# EAGLE board ekomigacz_3R (EAGLE 9.3.2)
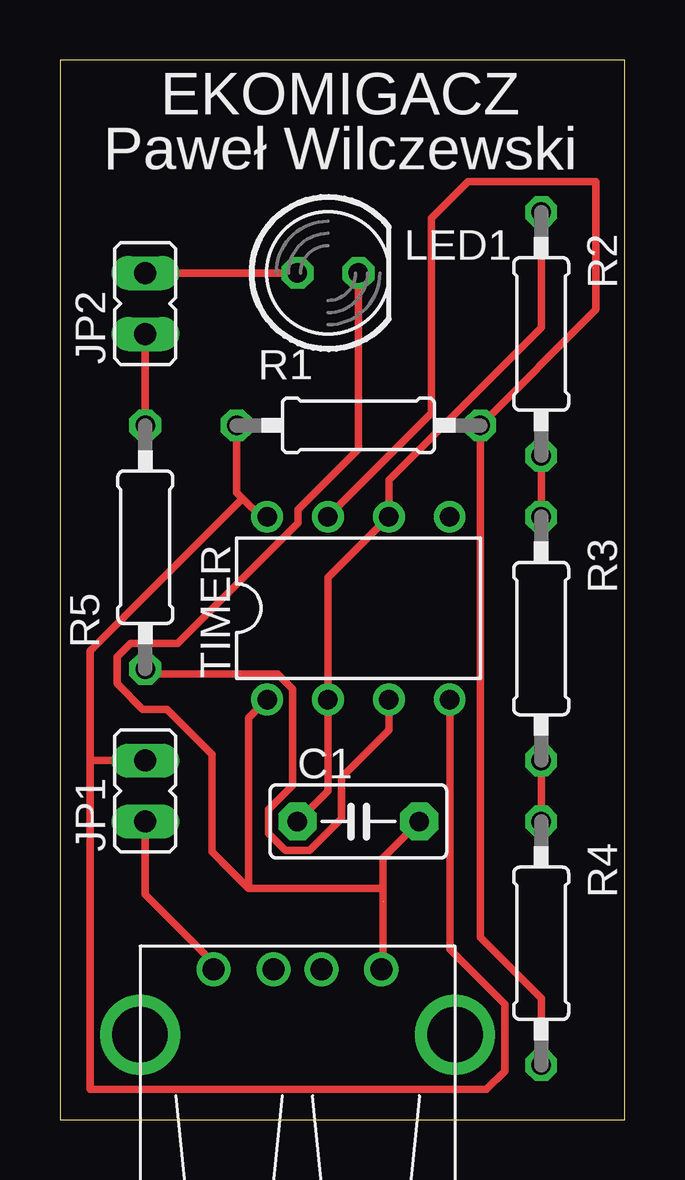
[diagram p0: board, top side]

Size 23.55 x 44.19 mm. Coordinates in mm from the lower left corner, seen from the top.
Outline: 0,0 23.55,0 23.55,44.19 0,44.19 0,0
Copper layers (1*16): Top 0.035mm / dielectric 1.5mm / Bottom 0.035mm
Design rules "default": minimum track width 6mil, minimum drill 0.35mm, track to track 6mil, track to pad 6mil, pad to pad 6mil, via to via 6mil, smd to smd 6mil, copper to edge 40mil, drill to drill 6mil, minimum pad ring 10mil, minimum via ring 8mil, stop-mask expansion 4mil, vias tented up to drill 0mil, thermal gap 10mil
Net classes: 0 default: width 0.305 mm, drill 0.508 mm, clearance 0.254 mm

## Footprints (pad centres in the part's own frame; a part is rotated, then mirrored left to right if it is on the bottom)
C5B3 = drill 0.813 pad 1.6 octagon: 1 -2.54,0; 2 2.54,0
JP1 = drill 0.914 long: 1 0,-1.27; 2 0,1.27
LED5MM = drill 0.813 octagon: A -1.27,0; K 1.27,0
0207/10 = drill 0.813 octagon: 1 -5.08,0; 2 5.08,0
DIL08 = drill 0.813 pad 1.27: 1 -3.81,-3.81; 2 -1.27,-3.81; 3 1.27,-3.81; 4 3.81,-3.81; 5 3.81,3.81; 6 1.27,3.81; 7 -1.27,3.81; 8 -3.81,3.81
USB-A-H = drill 0.914: D+ 2.718,-1.003; D- 2.718,1.003; GND 2.718,-3.493; VBUS 2.718,3.493 | drill 2.311: P$5 0,-6.566; P$6 0,6.566

## Placement (x,y rotation side)
C1  [C5B3]  12.45,12.45 0 top
JP1  [JP1]  3.56,13.72 0 top
JP2  [JP1]  3.56,34.04 0 top
LED1  [LED5MM]  11.18,35.31 0 top
R1  [0207/10]  12.45,28.96 0 top
R2  [0207/10]  20.07,32.77 270 top
R3  [0207/10]  20.07,20.07 270 top
R4  [0207/10]  20.07,7.37 270 top
R5  [0207/10]  3.56,23.88 90 top
TIMER  TLC555  [DIL08]  12.45,21.34 0 top
X1  USB-A-H  [USB-A-H]  9.91,3.56 90 top

## Library data of the parts
C1 = capacitor-wima
JP1 JP2 = jumper
LED1 = led
R1-R5 = rcl; SPICEPREFIX: R
TIMER = linear; SPICEPREFIX: X
X1 = con-usb

## Nets
0: C1.2 LED1.K TIMER.1 X1.GND
N$1: R5.1 TIMER.3
N$2: R1.2 R4.2 TIMER.7
N$3: C1.1 R2.1 TIMER.2 TIMER.6
N$4: JP1.2 R1.1 TIMER.4 TIMER.8
N$5: R3.2 R4.1
N$7: JP2.2 LED1.A
N$8: R2.2 R3.1
S$1: JP1.1 X1.VBUS
S$2: JP2.1 R5.2

## Tracks (layer width: path | path; a pad name or v marks a point on that pad's centre or on a via)
0  (1 unrouted)
  Top 0.305: LED1.K 12.45,27.96 9.93,25.45 9.93,24.89 4.9,19.86 2.95,19.86 2.39,19.3 2.39,18.19 3.45,17.12 4.47,17.12 6.35,15.24 6.35,11.18 7.87,9.65 | TIMER.1 7.87,16.76 7.87,9.65 | 7.87,9.65 13.46,9.65 | C1.2 13.46,10.92 13.46,9.65 | 13.46,9.65 13.46,9.11 | 13.46,9.09 13.46,6.34 X1.GND
N$1
  Top 0.305: R5.1 3.76,18.59 9.08,18.59 9.7,17.97 9.7,13.95 8.7,12.95 8.7,11.95 9.41,11.24 10.41,11.24 11.73,12.57 11.73,14.28 13.72,16.26 TIMER.3
N$2
  Top 0.305: TIMER.7 15.49,29.46 15.49,37.59 17.02,39.12 22.35,39.12 22.35,33.78 R1.2 17.53,7.62 20.07,5.08 R4.2
N$3
  Top 0.305: R2.1 20.07,33.02 13.72,26.67 TIMER.6 11.18,22.61 TIMER.2 11.18,13.72 C1.1
N$4
  Top 0.305: TIMER.4 16.26,7.11 18.54,4.83 18.54,2.03 17.78,1.27 1.27,1.27 1.27,14.99 | JP1.2 1.27,14.99 | 1.27,14.99 1.27,19.56 7.62,25.91 | 7.62,25.91 7.37,26.16 R1.1 | 7.62,25.91 8.38,25.15 TIMER.8
N$5
  Top 0.305: R4.1 R3.2
N$7
  Top 0.305: JP2.2 LED1.A
N$8
  Top 0.305: R3.1 R2.2
S$1
  Top 0.305: X1.VBUS 6.41,6.54 3.56,9.4 JP1.1
S$2
  Top 0.305: R5.2 JP2.1

## Text on the board
tNames: EKOMIGACZ | Paweł Wilczewski